# Altium PCB S52最小系统.PcbDoc (part 2 of 9)
Units mm, origin at the board's own origin, x right, y up, seen from the top; angles counter-clockwise.
Board outline 152.4 x 101.6 mm, 2 copper layers (Top Layer, Bottom Layer); 29 components, 53 nets, 176 pads, 2 vias.
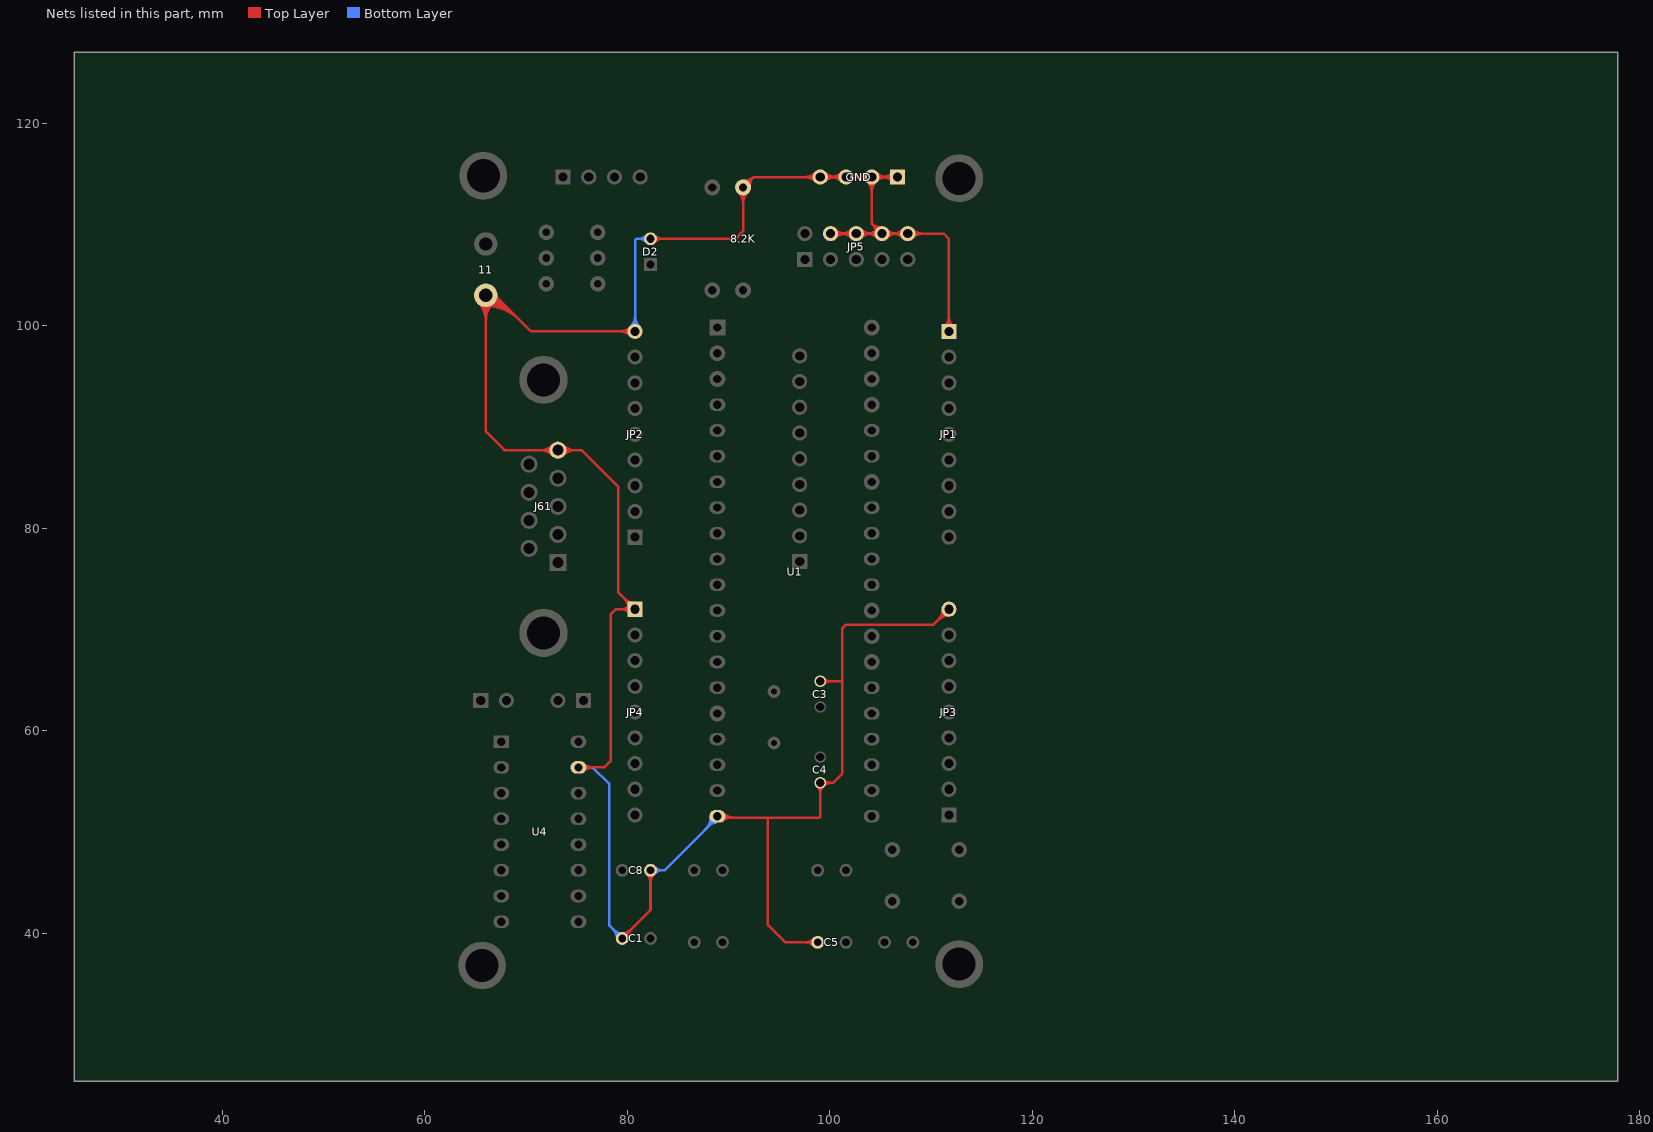
[diagram p2: the nets of this part, all layers, seen from the top]

## Via types
v1: diameter 1.27, hole 0.711, Top Layer to Bottom Layer, 2 vias

## Nets (pads, with @x,y where several pads share a name; then routed paths per layer and width w, separated by ;. In a path a pad name is that pad's centre, name@x,y a point inside that pad or via, vN(x,y) a via of type N, cw(c..) or ccw(c..) an arc to the next point about the centre after c; other vN are vias at no path point) (continued)
GND: (continued)
  Top Layer w0.254: U4.15@75.18,56.387 77.723,56.387 78.359,57.023 78.359,71.501 78.867,72.009 JP4.1@80.772,72.009 79.121,73.66 79.121,84.074 75.486,87.709 67.866,87.709 66.04,89.535 11.2@66.04,102.997 66.929,102.997 70.485,99.441 JP2.9@80.772,99.441 ; C1.2@79.883,39.497 C1.2@79.502,39.497 82.296,42.291 C8.1@82.296,46.228 ; D2.2@82.296,108.585 90.678,108.585 91.441,109.348 91.441,113.666 92.456,114.681 ; U1.20@88.896,51.434 98.934,51.434 99.06,51.56 C4.2@99.06,54.864 100.33,54.864 101.219,55.753 101.219,70.104 101.6,70.485 110.236,70.485 JP3.9@111.76,72.009 ; 93.853,51.434 93.853,40.894 95.631,39.116 C5.2@98.806,39.116 ; C3.2@99.06,64.897 101.092,64.897 101.219,65.024 ; JP5.4@100.076,109.093 111.252,109.093 111.76,108.585 JP1.1@111.76,99.441 ; JP5.4@100.337,108.832 cw(c100.967,108.202) 100.967,109.093 cw(c100.967,109.984) JP5.4@100.337,109.354 ; JP5.4@100.517,108.652 cw(c101.58,107.589) 101.58,109.093 cw(c101.58,110.597) JP5.4@100.517,109.534 ; JP5.6@102.175,108.652 ccw(c101.112,107.589) 101.112,109.093 ccw(c101.112,110.597) JP5.6@102.175,109.534 ; JP5.6@102.355,108.832 ccw(c101.725,108.202) 101.725,109.093 ccw(c101.725,109.984) JP5.6@102.355,109.354 ; GND.2@104.14,114.681 104.14,110.109 ; JP5.8@105.156,109.093 104.14,110.109 ; GND.1@106.68,114.681 92.456,114.681 ; 11.2@65.31,102.267 cw(c63.546,100.503) 66.04,100.503 ; 11.2@65.31,102.267 cw(c63.546,100.503) 66.04,100.503 ; 11.2@65.31,102.267 cw(c63.546,100.503) 66.04,100.503 ; 11.2@65.31,102.267 cw(c63.546,100.503) 66.04,100.503 ; 11.2@65.31,102.267 cw(c63.546,100.503) 66.04,100.503 ; 11.2@65.31,102.267 cw(c63.546,100.503) 66.04,100.503 ; 11.2@65.31,102.267 cw(c63.546,100.503) 66.04,100.503 ; 11.2@65.31,102.267 cw(c63.546,100.503) 66.04,100.503 ; 11.2@65.31,102.267 cw(c63.546,100.503) 66.04,100.503 ; 11.2@65.31,102.267 cw(c63.546,100.503) 66.04,100.503 ; 11.2@65.489,102.446 cw(c64.159,101.116) 66.04,101.116 ; 11.2@65.489,102.446 cw(c64.159,101.116) 66.04,101.116 ; 11.2@65.489,102.446 cw(c64.159,101.116) 66.04,101.116 ; 11.2@65.489,102.446 cw(c64.159,101.116) 66.04,101.116 ; 11.2@65.489,102.446 cw(c64.159,101.116) 66.04,101.116 ; 11.2@65.489,102.446 cw(c64.159,101.116) 66.04,101.116 ; 11.2@65.489,102.446 cw(c64.159,101.116) 66.04,101.116 ; 11.2@65.489,102.446 cw(c64.159,101.116) 66.04,101.116 ; 11.2@65.489,102.446 cw(c64.159,101.116) 66.04,101.116 ; 11.2@65.489,102.446 cw(c64.159,101.116) 66.04,101.116 ; 11.2@65.669,102.626 cw(c64.773,101.73) 66.04,101.73 ; 11.2@65.669,102.626 cw(c64.773,101.73) 66.04,101.73 ; 11.2@65.669,102.626 cw(c64.773,101.73) 66.04,101.73 ; 11.2@65.669,102.626 cw(c64.773,101.73) 66.04,101.73 ; 11.2@65.669,102.626 cw(c64.773,101.73) 66.04,101.73 ; 11.2@65.669,102.626 cw(c64.773,101.73) 66.04,101.73 ; 11.2@65.669,102.626 cw(c64.773,101.73) 66.04,101.73 ; 11.2@65.669,102.626 cw(c64.773,101.73) 66.04,101.73 ; 11.2@65.669,102.626 cw(c64.773,101.73) 66.04,101.73 ; 11.2@65.669,102.626 cw(c64.773,101.73) 66.04,101.73 ; 66.04,100.503 cw(c68.534,100.503) 11.2@66.77,102.267 ; 66.04,100.503 cw(c68.534,100.503) 11.2@66.77,102.267 ; 66.04,100.503 cw(c68.534,100.503) 11.2@66.77,102.267 ; 66.04,100.503 cw(c68.534,100.503) 11.2@66.77,102.267 ; 66.04,100.503 cw(c68.534,100.503) 11.2@66.77,102.267 ; 66.04,100.503 cw(c68.534,100.503) 11.2@66.77,102.267 ; 66.04,100.503 cw(c68.534,100.503) 11.2@66.77,102.267 ; 66.04,100.503 cw(c68.534,100.503) 11.2@66.77,102.267 ; 66.04,100.503 cw(c68.534,100.503) 11.2@66.77,102.267 ; 66.04,100.503 cw(c68.534,100.503) 11.2@66.77,102.267 ; 66.04,101.116 cw(c67.921,101.116) 11.2@66.591,102.446 ; 66.04,101.116 cw(c67.921,101.116) 11.2@66.591,102.446 ; 66.04,101.116 cw(c67.921,101.116) 11.2@66.591,102.446 ; 66.04,101.116 cw(c67.921,101.116) 11.2@66.591,102.446 ; 66.04,101.116 cw(c67.921,101.116) 11.2@66.591,102.446 ; 66.04,101.116 cw(c67.921,101.116) 11.2@66.591,102.446 ; 66.04,101.116 cw(c67.921,101.116) 11.2@66.591,102.446 ; 66.04,101.116 cw(c67.921,101.116) 11.2@66.591,102.446 ; 66.04,101.116 cw(c67.921,101.116) 11.2@66.591,102.446 ; 66.04,101.116 cw(c67.921,101.116) 11.2@66.591,102.446 ; 66.04,101.73 cw(c67.307,101.73) 11.2@66.411,102.626 ; 66.04,101.73 cw(c67.307,101.73) 11.2@66.411,102.626 ; 66.04,101.73 cw(c67.307,101.73) 11.2@66.411,102.626 ; 66.04,101.73 cw(c67.307,101.73) 11.2@66.411,102.626 ; 66.04,101.73 cw(c67.307,101.73) 11.2@66.411,102.626 ; 66.04,101.73 cw(c67.307,101.73) 11.2@66.411,102.626 ; 66.04,101.73 cw(c67.307,101.73) 11.2@66.411,102.626 ; 66.04,101.73 cw(c67.307,101.73) 11.2@66.411,102.626 ; 66.04,101.73 cw(c67.307,101.73) 11.2@66.411,102.626 ; 66.04,101.73 cw(c67.307,101.73) 11.2@66.411,102.626 ; 11.2@66.04,101.964 cw(c66.04,97.324) 69.321,100.605 ; 11.2@66.04,101.964 cw(c66.04,97.324) 69.321,100.605 ; 11.2@66.04,101.964 cw(c66.04,97.324) 69.321,100.605 ; 11.2@66.04,101.964 cw(c66.04,97.324) 69.321,100.605 ; 11.2@66.04,101.964 cw(c66.04,97.324) 69.321,100.605 ; 11.2@66.04,101.964 cw(c66.04,97.324) 69.321,100.605 ; 11.2@66.04,101.964 cw(c66.04,97.324) 69.321,100.605 ; 11.2@66.04,101.964 cw(c66.04,97.324) 69.321,100.605 ; 11.2@66.04,101.964 cw(c66.04,97.324) 69.321,100.605 ; 11.2@66.04,101.964 cw(c66.04,97.324) 69.321,100.605 ; 11.2@66.04,102.218 cw(c66.04,98.191) 68.887,101.039 ; 11.2@66.04,102.218 cw(c66.04,98.191) 68.887,101.039 ; 11.2@66.04,102.218 cw(c66.04,98.191) 68.887,101.039 ; 11.2@66.04,102.218 cw(c66.04,98.191) 68.887,101.039 ; 11.2@66.04,102.218 cw(c66.04,98.191) 68.887,101.039 ; 11.2@66.04,102.218 cw(c66.04,98.191) 68.887,101.039 ; 11.2@66.04,102.218 cw(c66.04,98.191) 68.887,101.039 ; 11.2@66.04,102.218 cw(c66.04,98.191) 68.887,101.039 ; 11.2@66.04,102.218 cw(c66.04,98.191) 68.887,101.039 ; 11.2@66.04,102.218 cw(c66.04,98.191) 68.887,101.039 ; 11.2@66.04,102.472 cw(c66.04,99.058) 68.454,101.472 ; 11.2@66.04,102.472 cw(c66.04,99.058) 68.454,101.472 ; 11.2@66.04,102.472 cw(c66.04,99.058) 68.454,101.472 ; 11.2@66.04,102.472 cw(c66.04,99.058) 68.454,101.472 ; 11.2@66.04,102.472 cw(c66.04,99.058) 68.454,101.472 ; 11.2@66.04,102.472 cw(c66.04,99.058) 68.454,101.472 ; 11.2@66.04,102.472 cw(c66.04,99.058) 68.454,101.472 ; 11.2@66.04,102.472 cw(c66.04,99.058) 68.454,101.472 ; 11.2@66.04,102.472 cw(c66.04,99.058) 68.454,101.472 ; 11.2@66.04,102.472 cw(c66.04,99.058) 68.454,101.472 ; 11.2@66.04,102.726 cw(c66.04,99.926) 68.02,101.906 ; 11.2@66.04,102.726 cw(c66.04,99.926) 68.02,101.906 ; 11.2@66.04,102.726 cw(c66.04,99.926) 68.02,101.906 ; 11.2@66.04,102.726 cw(c66.04,99.926) 68.02,101.906 ; 11.2@66.04,102.726 cw(c66.04,99.926) 68.02,101.906 ; 11.2@66.04,102.726 cw(c66.04,99.926) 68.02,101.906 ; 11.2@66.04,102.726 cw(c66.04,99.926) 68.02,101.906 ; 11.2@66.04,102.726 cw(c66.04,99.926) 68.02,101.906 ; 11.2@66.04,102.726 cw(c66.04,99.926) 68.02,101.906 ; 11.2@66.04,102.726 cw(c66.04,99.926) 68.02,101.906 ; 11.2@66.04,102.98 cw(c66.04,100.793) 67.587,102.339 ; 11.2@66.04,102.98 cw(c66.04,100.793) 67.587,102.339 ; 11.2@66.04,102.98 cw(c66.04,100.793) 67.587,102.339 ; 11.2@66.04,102.98 cw(c66.04,100.793) 67.587,102.339 ; 11.2@66.04,102.98 cw(c66.04,100.793) 67.587,102.339 ; 11.2@66.04,102.98 cw(c66.04,100.793) 67.587,102.339 ; 11.2@66.04,102.98 cw(c66.04,100.793) 67.587,102.339 ; 11.2@66.04,102.98 cw(c66.04,100.793) 67.587,102.339 ; 11.2@66.04,102.98 cw(c66.04,100.793) 67.587,102.339 ; 11.2@66.04,102.98 cw(c66.04,100.793) 67.587,102.339 ; 11.2@67.073,102.997 ccw(c67.421,102.997) 67.175,102.751 ; 11.2@67.073,102.997 ccw(c67.421,102.997) 67.175,102.751 ; 11.2@67.073,102.997 ccw(c67.421,102.997) 67.175,102.751 ; 11.2@67.073,102.997 ccw(c67.421,102.997) 67.175,102.751 ; 11.2@67.073,102.997 ccw(c67.421,102.997) 67.175,102.751 ; 11.2@67.073,102.997 ccw(c67.421,102.997) 67.175,102.751 ; 11.2@67.073,102.997 ccw(c67.421,102.997) 67.175,102.751 ; 11.2@67.073,102.997 ccw(c67.421,102.997) 67.175,102.751 ; 11.2@67.073,102.997 ccw(c67.421,102.997) 67.175,102.751 ; 11.2@67.073,102.997 ccw(c67.421,102.997) 67.175,102.751 ; 71.417,87.709 cw(c71.417,85.976) J61.5@72.642,87.201 ; 71.417,87.709 ccw(c71.417,89.442) J61.5@72.642,88.217 ; 71.417,87.709 cw(c71.417,85.976) J61.5@72.642,87.201 ; 71.417,87.709 ccw(c71.417,89.442) J61.5@72.642,88.217 ; 71.417,87.709 cw(c71.417,85.976) J61.5@72.642,87.201 ; 71.417,87.709 ccw(c71.417,89.442) J61.5@72.642,88.217 ; 71.417,87.709 ccw(c71.417,89.442) J61.5@72.642,88.217 ; 71.417,87.709 cw(c71.417,85.976) J61.5@72.642,87.201 ; 71.417,87.709 ccw(c71.417,89.442) J61.5@72.642,88.217 ; 71.417,87.709 cw(c71.417,85.976) J61.5@72.642,87.201 ; 71.417,87.709 ccw(c71.417,89.442) J61.5@72.642,88.217 ; 71.417,87.709 cw(c71.417,85.976) J61.5@72.642,87.201 ; 71.417,87.709 ccw(c71.417,89.442) J61.5@72.642,88.217 ; 71.417,87.709 cw(c71.417,85.976) J61.5@72.642,87.201 ; 71.417,87.709 ccw(c71.417,89.442) J61.5@72.642,88.217 ; 71.417,87.709 cw(c71.417,85.976) J61.5@72.642,87.201 ; 71.417,87.709 ccw(c71.417,89.442) J61.5@72.642,88.217 ; 71.417,87.709 cw(c71.417,85.976) J61.5@72.642,87.201 ; 71.417,87.709 ccw(c71.417,89.442) J61.5@72.642,88.217 ; 71.417,87.709 cw(c71.417,85.976) J61.5@72.642,87.201 ; 72.03,87.709 cw(c72.03,86.589) J61.5@72.822,87.381 ; 72.03,87.709 ccw(c72.03,88.829) J61.5@72.822,88.037 ; 72.03,87.709 cw(c72.03,86.589) J61.5@72.822,87.381 ; 72.03,87.709 ccw(c72.03,88.829) J61.5@72.822,88.037 ; 72.03,87.709 cw(c72.03,86.589) J61.5@72.822,87.381 ; 72.03,87.709 ccw(c72.03,88.829) J61.5@72.822,88.037 ; 72.03,87.709 ccw(c72.03,88.829) J61.5@72.822,88.037 ; 72.03,87.709 cw(c72.03,86.589) J61.5@72.822,87.381 ; 72.03,87.709 ccw(c72.03,88.829) J61.5@72.822,88.037 ; 72.03,87.709 cw(c72.03,86.589) J61.5@72.822,87.381 ; 72.03,87.709 ccw(c72.03,88.829) J61.5@72.822,88.037 ; 72.03,87.709 cw(c72.03,86.589) J61.5@72.822,87.381 ; 72.03,87.709 ccw(c72.03,88.829) J61.5@72.822,88.037 ; 72.03,87.709 cw(c72.03,86.589) J61.5@72.822,87.381 ; 72.03,87.709 ccw(c72.03,88.829) J61.5@72.822,88.037 ; 72.03,87.709 cw(c72.03,86.589) J61.5@72.822,87.381 ; 72.03,87.709 ccw(c72.03,88.829) J61.5@72.822,88.037 ; 72.03,87.709 cw(c72.03,86.589) J61.5@72.822,87.381 ; 72.03,87.709 ccw(c72.03,88.829) J61.5@72.822,88.037 ; 72.03,87.709 cw(c72.03,86.589) J61.5@72.822,87.381 ; J61.5@73.478,87.381 cw(c74.27,86.589) 74.27,87.709 ; J61.5@73.478,87.381 cw(c74.27,86.589) 74.27,87.709 ; J61.5@73.478,87.381 cw(c74.27,86.589) 74.27,87.709 ; J61.5@73.478,87.381 cw(c74.27,86.589) 74.27,87.709 ; J61.5@73.478,87.381 cw(c74.27,86.589) 74.27,87.709 ; J61.5@73.478,87.381 cw(c74.27,86.589) 74.27,87.709 ; J61.5@73.478,87.381 cw(c74.27,86.589) 74.27,87.709 ; J61.5@73.478,87.381 cw(c74.27,86.589) 74.27,87.709 ; J61.5@73.478,87.381 cw(c74.27,86.589) 74.27,87.709 ; J61.5@73.478,87.381 cw(c74.27,86.589) 74.27,87.709 ; J61.5@73.478,88.037 ccw(c74.27,88.829) 74.27,87.709 ; J61.5@73.478,88.037 ccw(c74.27,88.829) 74.27,87.709 ; J61.5@73.478,88.037 ccw(c74.27,88.829) 74.27,87.709 ; J61.5@73.478,88.037 ccw(c74.27,88.829) 74.27,87.709 ; J61.5@73.478,88.037 ccw(c74.27,88.829) 74.27,87.709 ; J61.5@73.478,88.037 ccw(c74.27,88.829) 74.27,87.709 ; J61.5@73.478,88.037 ccw(c74.27,88.829) 74.27,87.709 ; J61.5@73.478,88.037 ccw(c74.27,88.829) 74.27,87.709 ; J61.5@73.478,88.037 ccw(c74.27,88.829) 74.27,87.709 ; J61.5@73.478,88.037 ccw(c74.27,88.829) 74.27,87.709 ; J61.5@73.658,87.201 cw(c74.883,85.976) 74.883,87.709 ; J61.5@73.658,87.201 cw(c74.883,85.976) 74.883,87.709 ; J61.5@73.658,87.201 cw(c74.883,85.976) 74.883,87.709 ; J61.5@73.658,87.201 cw(c74.883,85.976) 74.883,87.709 ; J61.5@73.658,87.201 cw(c74.883,85.976) 74.883,87.709 ; J61.5@73.658,87.201 cw(c74.883,85.976) 74.883,87.709 ; J61.5@73.658,87.201 cw(c74.883,85.976) 74.883,87.709 ; J61.5@73.658,87.201 cw(c74.883,85.976) 74.883,87.709 ; J61.5@73.658,87.201 cw(c74.883,85.976) 74.883,87.709 ; J61.5@73.658,87.201 cw(c74.883,85.976) 74.883,87.709 ; J61.5@73.658,88.217 ccw(c74.883,89.442) 74.883,87.709 ; J61.5@73.658,88.217 ccw(c74.883,89.442) 74.883,87.709 ; J61.5@73.658,88.217 ccw(c74.883,89.442) 74.883,87.709 ; J61.5@73.658,88.217 ccw(c74.883,89.442) 74.883,87.709 ; J61.5@73.658,88.217 ccw(c74.883,89.442) 74.883,87.709 ; J61.5@73.658,88.217 ccw(c74.883,89.442) 74.883,87.709 ; J61.5@73.658,88.217 ccw(c74.883,89.442) 74.883,87.709 ; J61.5@73.658,88.217 ccw(c74.883,89.442) 74.883,87.709 ; J61.5@73.658,88.217 ccw(c74.883,89.442) 74.883,87.709 ; J61.5@73.658,88.217 ccw(c74.883,89.442) 74.883,87.709 ; U4.15@75.695,56.035 cw(c76.545,55.185) 76.545,56.387 ; U4.15@75.695,56.035 cw(c76.545,55.185) 76.545,56.387 ; U4.15@75.695,56.035 cw(c76.545,55.185) 76.545,56.387 ; U4.15@75.695,56.035 cw(c76.545,55.185) 76.545,56.387 ; U4.15@75.695,56.035 cw(c76.545,55.185) 76.545,56.387 ; U4.15@75.695,56.035 cw(c76.545,55.185) 76.545,56.387 ; U4.15@75.695,56.035 cw(c76.545,55.185) 76.545,56.387 ; U4.15@75.695,56.035 cw(c76.545,55.185) 76.545,56.387 ; U4.15@75.695,56.035 cw(c76.545,55.185) 76.545,56.387 ; U4.15@75.695,56.035 cw(c76.545,55.185) 76.545,56.387 ; U4.15@75.695,56.739 ccw(c76.545,57.589) 76.545,56.387 ; U4.15@75.695,56.739 ccw(c76.545,57.589) 76.545,56.387 ; U4.15@75.695,56.739 ccw(c76.545,57.589) 76.545,56.387 ; U4.15@75.695,56.739 ccw(c76.545,57.589) 76.545,56.387 ; U4.15@75.695,56.739 ccw(c76.545,57.589) 76.545,56.387 ; U4.15@75.695,56.739 ccw(c76.545,57.589) 76.545,56.387 ; U4.15@75.695,56.739 ccw(c76.545,57.589) 76.545,56.387 ; U4.15@75.695,56.739 ccw(c76.545,57.589) 76.545,56.387 ; U4.15@75.695,56.739 ccw(c76.545,57.589) 76.545,56.387 ; U4.15@75.695,56.739 ccw(c76.545,57.589) 76.545,56.387 ; 79.268,72.009 cw(c79.268,70.505) JP4.1@80.331,71.568 ; 79.268,72.009 ccw(c79.268,73.513) JP4.1@80.331,72.45 ; 79.268,72.009 cw(c79.268,70.505) JP4.1@80.331,71.568 ; 79.268,72.009 ccw(c79.268,73.513) JP4.1@80.331,72.45 ; 79.268,72.009 cw(c79.268,70.505) JP4.1@80.331,71.568 ; 79.268,72.009 ccw(c79.268,73.513) JP4.1@80.331,72.45 ; 79.268,72.009 ccw(c79.268,73.513) JP4.1@80.331,72.45 ; 79.268,72.009 cw(c79.268,70.505) JP4.1@80.331,71.568 ; 79.268,72.009 ccw(c79.268,73.513) JP4.1@80.331,72.45 ; 79.268,72.009 cw(c79.268,70.505) JP4.1@80.331,71.568 ; 79.268,72.009 ccw(c79.268,73.513) JP4.1@80.331,72.45 ; 79.268,72.009 cw(c79.268,70.505) JP4.1@80.331,71.568 ; 79.268,72.009 ccw(c79.268,73.513) JP4.1@80.331,72.45 ; 79.268,72.009 cw(c79.268,70.505) JP4.1@80.331,71.568 ; 79.268,72.009 ccw(c79.268,73.513) JP4.1@80.331,72.45 ; 79.268,72.009 cw(c79.268,70.505) JP4.1@80.331,71.568 ; 79.268,72.009 ccw(c79.268,73.513) JP4.1@80.331,72.45 ; 79.268,72.009 cw(c79.268,70.505) JP4.1@80.331,71.568 ; 79.268,72.009 ccw(c79.268,73.513) JP4.1@80.331,72.45 ; 79.268,72.009 cw(c79.268,70.505) JP4.1@80.331,71.568 ; 79.268,99.441 cw(c79.268,97.937) JP2.9@80.331,99 ; 79.268,99.441 ccw(c79.268,100.945) JP2.9@80.331,99.882 ; 79.268,99.441 cw(c79.268,97.937) JP2.9@80.331,99 ; 79.268,99.441 ccw(c79.268,100.945) JP2.9@80.331,99.882 ; 79.268,99.441 cw(c79.268,97.937) JP2.9@80.331,99 ; 79.268,99.441 ccw(c79.268,100.945) JP2.9@80.331,99.882 ; 79.268,99.441 ccw(c79.268,100.945) JP2.9@80.331,99.882 ; 79.268,99.441 cw(c79.268,97.937) JP2.9@80.331,99 ; 79.268,99.441 ccw(c79.268,100.945) JP2.9@80.331,99.882 ; 79.268,99.441 cw(c79.268,97.937) JP2.9@80.331,99 ; 79.268,99.441 ccw(c79.268,100.945) JP2.9@80.331,99.882 ; 79.268,99.441 cw(c79.268,97.937) JP2.9@80.331,99 ; 79.268,99.441 ccw(c79.268,100.945) JP2.9@80.331,99.882 ; 79.268,99.441 cw(c79.268,97.937) JP2.9@80.331,99 ; 79.268,99.441 ccw(c79.268,100.945) JP2.9@80.331,99.882 ; 79.268,99.441 cw(c79.268,97.937) JP2.9@80.331,99 ; 79.268,99.441 ccw(c79.268,100.945) JP2.9@80.331,99.882 ; 79.268,99.441 cw(c79.268,97.937) JP2.9@80.331,99 ; 79.268,99.441 ccw(c79.268,100.945) JP2.9@80.331,99.882 ; 79.268,99.441 cw(c79.268,97.937) JP2.9@80.331,99 ; C1.2@79.502,40.005 ccw(c79.502,41.231) 80.369,40.364 ; C1.2@79.502,40.005 ccw(c79.502,41.231) 80.369,40.364 ; C1.2@79.502,40.005 ccw(c79.502,41.231) 80.369,40.364 ; C1.2@79.502,40.005 ccw(c79.502,41.231) 80.369,40.364 ; C1.2@79.502,40.005 ccw(c79.502,41.231) 80.369,40.364 ; C1.2@79.502,40.005 ccw(c79.502,41.231) 80.369,40.364 ; C1.2@79.502,40.005 ccw(c79.502,41.231) 80.369,40.364 ; C1.2@79.502,40.005 ccw(c79.502,41.231) 80.369,40.364 ; C1.2@79.502,40.005 ccw(c79.502,41.231) 80.369,40.364 ; C1.2@79.502,40.005 ccw(c79.502,41.231) 80.369,40.364 ; 79.708,73.073 cw(c78.645,72.009) JP4.1@80.149,72.009 ; 79.708,73.073 ccw(c80.772,74.136) JP4.1@80.772,72.632 ; 79.708,73.073 cw(c78.645,72.009) JP4.1@80.149,72.009 ; 79.708,73.073 ccw(c80.772,74.136) JP4.1@80.772,72.632 ; 79.708,73.073 cw(c78.645,72.009) JP4.1@80.149,72.009 ; 79.708,73.073 ccw(c80.772,74.136) JP4.1@80.772,72.632 ; 79.708,73.073 ccw(c80.772,74.136) JP4.1@80.772,72.632 ; 79.708,73.073 cw(c78.645,72.009) JP4.1@80.149,72.009 ; 79.708,73.073 ccw(c80.772,74.136) JP4.1@80.772,72.632 ; 79.708,73.073 cw(c78.645,72.009) JP4.1@80.149,72.009 ; 79.708,73.073 ccw(c80.772,74.136) JP4.1@80.772,72.632 ; 79.708,73.073 cw(c78.645,72.009) JP4.1@80.149,72.009 ; 79.708,73.073 ccw(c80.772,74.136) JP4.1@80.772,72.632 ; 79.708,73.073 cw(c78.645,72.009) JP4.1@80.149,72.009 ; 79.708,73.073 ccw(c80.772,74.136) JP4.1@80.772,72.632 ; 79.708,73.073 cw(c78.645,72.009) JP4.1@80.149,72.009 ; 79.708,73.073 ccw(c80.772,74.136) JP4.1@80.772,72.632 ; 79.708,73.073 cw(c78.645,72.009) JP4.1@80.149,72.009 ; 79.708,73.073 ccw(c80.772,74.136) JP4.1@80.772,72.632 ; 79.708,73.073 cw(c78.645,72.009) JP4.1@80.149,72.009 ; 79.881,72.009 cw(c79.881,71.118) JP4.1@80.511,71.748 ; 79.881,72.009 ccw(c79.881,72.9) JP4.1@80.511,72.27 ; 79.881,72.009 cw(c79.881,71.118) JP4.1@80.511,71.748 ; 79.881,72.009 ccw(c79.881,72.9) JP4.1@80.511,72.27 ; 79.881,72.009 cw(c79.881,71.118) JP4.1@80.511,71.748 ; 79.881,72.009 ccw(c79.881,72.9) JP4.1@80.511,72.27 ; 79.881,72.009 ccw(c79.881,72.9) JP4.1@80.511,72.27 ; 79.881,72.009 cw(c79.881,71.118) JP4.1@80.511,71.748 ; 79.881,72.009 ccw(c79.881,72.9) JP4.1@80.511,72.27 ; 79.881,72.009 cw(c79.881,71.118) JP4.1@80.511,71.748 ; 79.881,72.009 ccw(c79.881,72.9) JP4.1@80.511,72.27 ; 79.881,72.009 cw(c79.881,71.118) JP4.1@80.511,71.748 ; 79.881,72.009 ccw(c79.881,72.9) JP4.1@80.511,72.27 ; 79.881,72.009 cw(c79.881,71.118) JP4.1@80.511,71.748 ; 79.881,72.009 ccw(c79.881,72.9) JP4.1@80.511,72.27 ; 79.881,72.009 cw(c79.881,71.118) JP4.1@80.511,71.748 ; 79.881,72.009 ccw(c79.881,72.9) JP4.1@80.511,72.27 ; 79.881,72.009 cw(c79.881,71.118) JP4.1@80.511,71.748 ; 79.881,72.009 ccw(c79.881,72.9) JP4.1@80.511,72.27 ; 79.881,72.009 cw(c79.881,71.118) JP4.1@80.511,71.748 ; 79.881,99.441 cw(c79.881,98.55) JP2.9@80.511,99.18 ; 79.881,99.441 ccw(c79.881,100.332) JP2.9@80.511,99.702 ; 79.881,99.441 cw(c79.881,98.55) JP2.9@80.511,99.18 ; 79.881,99.441 ccw(c79.881,100.332) JP2.9@80.511,99.702 ; 79.881,99.441 cw(c79.881,98.55) JP2.9@80.511,99.18 ; 79.881,99.441 ccw(c79.881,100.332) JP2.9@80.511,99.702 ; 79.881,99.441 ccw(c79.881,100.332) JP2.9@80.511,99.702 ; 79.881,99.441 cw(c79.881,98.55) JP2.9@80.511,99.18 ; 79.881,99.441 ccw(c79.881,100.332) JP2.9@80.511,99.702 ; 79.881,99.441 cw(c79.881,98.55) JP2.9@80.511,99.18 ; 79.881,99.441 ccw(c79.881,100.332) JP2.9@80.511,99.702 ; 79.881,99.441 cw(c79.881,98.55) JP2.9@80.511,99.18 ; 79.881,99.441 ccw(c79.881,100.332) JP2.9@80.511,99.702 ; 79.881,99.441 cw(c79.881,98.55) JP2.9@80.511,99.18 ; 79.881,99.441 ccw(c79.881,100.332) JP2.9@80.511,99.702 ; 79.881,99.441 cw(c79.881,98.55) JP2.9@80.511,99.18 ; 79.881,99.441 ccw(c79.881,100.332) JP2.9@80.511,99.702 ; 79.881,99.441 cw(c79.881,98.55) JP2.9@80.511,99.18 ; 79.881,99.441 ccw(c79.881,100.332) JP2.9@80.511,99.702 ; 79.881,99.441 cw(c79.881,98.55) JP2.9@80.511,99.18 ; C1.2@80.01,39.497 cw(c81.236,39.497) 80.369,40.364 ; C1.2@80.01,39.497 cw(c81.236,39.497) 80.369,40.364 ; C1.2@80.01,39.497 cw(c81.236,39.497) 80.369,40.364 ; C1.2@80.01,39.497 cw(c81.236,39.497) 80.369,40.364 ; C1.2@80.01,39.497 cw(c81.236,39.497) 80.369,40.364 ; C1.2@80.01,39.497 cw(c81.236,39.497) 80.369,40.364 ; C1.2@80.01,39.497 cw(c81.236,39.497) 80.369,40.364 ; C1.2@80.01,39.497 cw(c81.236,39.497) 80.369,40.364 ; C1.2@80.01,39.497 cw(c81.236,39.497) 80.369,40.364 ; C1.2@80.01,39.497 cw(c81.236,39.497) 80.369,40.364 ; JP4.1@80.142,72.639 cw(c79.512,72.009) JP4.1@80.403,72.009 ; JP4.1@80.142,72.639 ccw(c80.772,73.269) JP4.1@80.772,72.378 ; JP4.1@80.142,72.639 cw(c79.512,72.009) JP4.1@80.403,72.009 ; JP4.1@80.142,72.639 ccw(c80.772,73.269) JP4.1@80.772,72.378 ; JP4.1@80.142,72.639 cw(c79.512,72.009) JP4.1@80.403,72.009 ; JP4.1@80.142,72.639 ccw(c80.772,73.269) JP4.1@80.772,72.378 ; JP4.1@80.142,72.639 ccw(c80.772,73.269) JP4.1@80.772,72.378 ; JP4.1@80.142,72.639 cw(c79.512,72.009) JP4.1@80.403,72.009 ; JP4.1@80.142,72.639 ccw(c80.772,73.269) JP4.1@80.772,72.378 ; JP4.1@80.142,72.639 cw(c79.512,72.009) JP4.1@80.403,72.009 ; JP4.1@80.142,72.639 ccw(c80.772,73.269) JP4.1@80.772,72.378 ; JP4.1@80.142,72.639 cw(c79.512,72.009) JP4.1@80.403,72.009 ; JP4.1@80.142,72.639 ccw(c80.772,73.269) JP4.1@80.772,72.378 ; JP4.1@80.142,72.639 cw(c79.512,72.009) JP4.1@80.403,72.009 ; JP4.1@80.142,72.639 ccw(c80.772,73.269) JP4.1@80.772,72.378 ; JP4.1@80.142,72.639 cw(c79.512,72.009) JP4.1@80.403,72.009 ; JP4.1@80.142,72.639 ccw(c80.772,73.269) JP4.1@80.772,72.378 ; JP4.1@80.142,72.639 cw(c79.512,72.009) JP4.1@80.403,72.009 ; JP4.1@80.142,72.639 ccw(c80.772,73.269) JP4.1@80.772,72.378 ; JP4.1@80.142,72.639 cw(c79.512,72.009) JP4.1@80.403,72.009 ; C8.1@81.937,45.869 cw(c81.07,45.002) 82.296,45.002 ; C8.1@81.937,45.869 cw(c81.07,45.002) 82.296,45.002 ; C8.1@81.937,45.869 cw(c81.07,45.002) 82.296,45.002 ; C8.1@81.937,45.869 cw(c81.07,45.002) 82.296,45.002 ; C8.1@81.937,45.869 cw(c81.07,45.002) 82.296,45.002 ; C8.1@81.937,45.869 cw(c81.07,45.002) 82.296,45.002 ; C8.1@81.937,45.869 cw(c81.07,45.002) 82.296,45.002 ; C8.1@81.937,45.869 cw(c81.07,45.002) 82.296,45.002 ; C8.1@81.937,45.869 cw(c81.07,45.002) 82.296,45.002 ; C8.1@81.937,45.869 cw(c81.07,45.002) 82.296,45.002 ; 82.296,45.002 cw(c83.522,45.002) C8.1@82.655,45.869 ; 82.296,45.002 cw(c83.522,45.002) C8.1@82.655,45.869 ; 82.296,45.002 cw(c83.522,45.002) C8.1@82.655,45.869 ; 82.296,45.002 cw(c83.522,45.002) C8.1@82.655,45.869 ; 82.296,45.002 cw(c83.522,45.002) C8.1@82.655,45.869 ; 82.296,45.002 cw(c83.522,45.002) C8.1@82.655,45.869 ; 82.296,45.002 cw(c83.522,45.002) C8.1@82.655,45.869 ; 82.296,45.002 cw(c83.522,45.002) C8.1@82.655,45.869 ; 82.296,45.002 cw(c83.522,45.002) C8.1@82.655,45.869 ; 82.296,45.002 cw(c83.522,45.002) C8.1@82.655,45.869 ; D2.2@82.655,108.226 cw(c83.522,107.359) 83.522,108.585 ; D2.2@82.655,108.226 cw(c83.522,107.359) 83.522,108.585 ; D2.2@82.655,108.226 cw(c83.522,107.359) 83.522,108.585 ; D2.2@82.655,108.226 cw(c83.522,107.359) 83.522,108.585 ; D2.2@82.655,108.226 cw(c83.522,107.359) 83.522,108.585 ; D2.2@82.655,108.226 cw(c83.522,107.359) 83.522,108.585 ; D2.2@82.655,108.226 cw(c83.522,107.359) 83.522,108.585 ; D2.2@82.655,108.226 cw(c83.522,107.359) 83.522,108.585 ; D2.2@82.655,108.226 cw(c83.522,107.359) 83.522,108.585 ; D2.2@82.655,108.226 cw(c83.522,107.359) 83.522,108.585 ; D2.2@82.655,108.944 ccw(c83.522,109.811) 83.522,108.585 ; D2.2@82.655,108.944 ccw(c83.522,109.811) 83.522,108.585 ; D2.2@82.655,108.944 ccw(c83.522,109.811) 83.522,108.585 ; D2.2@82.655,108.944 ccw(c83.522,109.811) 83.522,108.585 ; D2.2@82.655,108.944 ccw(c83.522,109.811) 83.522,108.585 ; D2.2@82.655,108.944 ccw(c83.522,109.811) 83.522,108.585 ; D2.2@82.655,108.944 ccw(c83.522,109.811) 83.522,108.585 ; D2.2@82.655,108.944 ccw(c83.522,109.811) 83.522,108.585 ; D2.2@82.655,108.944 ccw(c83.522,109.811) 83.522,108.585 ; D2.2@82.655,108.944 ccw(c83.522,109.811) 83.522,108.585 ; U1.20@89.231,51.734 ccw(c89.954,52.457) 89.954,51.434 ; U1.20@89.231,51.734 ccw(c89.954,52.457) 89.954,51.434 ; U1.20@89.231,51.734 ccw(c89.954,52.457) 89.954,51.434 ; U1.20@89.231,51.734 ccw(c89.954,52.457) 89.954,51.434 ; U1.20@89.411,51.082 cw(c90.261,50.232) 90.261,51.434 ; U1.20@89.411,51.082 cw(c90.261,50.232) 90.261,51.434 ; U1.20@89.411,51.082 cw(c90.261,50.232) 90.261,51.434 ; U1.20@89.411,51.082 cw(c90.261,50.232) 90.261,51.434 ; U1.20@89.411,51.082 cw(c90.261,50.232) 90.261,51.434 ; U1.20@89.411,51.082 cw(c90.261,50.232) 90.261,51.434 ; U1.20@89.411,51.209 cw(c89.954,50.665) 89.954,51.434 ; U1.20@89.411,51.209 cw(c89.954,50.665) 89.954,51.434 ; U1.20@89.411,51.209 cw(c89.954,50.665) 89.954,51.434 ; U1.20@89.411,51.209 cw(c89.954,50.665) 89.954,51.434 ; U1.20@89.411,51.786 ccw(c90.261,52.636) 90.261,51.434 ; U1.20@89.411,51.786 ccw(c90.261,52.636) 90.261,51.434 ; U1.20@89.411,51.786 ccw(c90.261,52.636) 90.261,51.434 ; U1.20@89.411,51.786 ccw(c90.261,52.636) 90.261,51.434 ; U1.20@89.411,51.786 ccw(c90.261,52.636) 90.261,51.434 ; U1.20@89.411,51.786 ccw(c90.261,52.636) 90.261,51.434 ; U1.20@89.411,51.913 ccw(c90.567,53.07) 90.567,51.434 ; U1.20@89.411,51.913 ccw(c90.567,53.07) 90.567,51.434 ; U1.20@89.411,51.913 ccw(c90.567,53.07) 90.567,51.434 ; U1.20@89.411,51.913 ccw(c90.567,53.07) 90.567,51.434 ; 8.2K.2@90.974,113.194 cw(c89.847,112.067) 91.441,112.067 ; 8.2K.2@90.974,113.194 cw(c89.847,112.067) 91.441,112.067 ; 8.2K.2@90.974,113.194 cw(c89.847,112.067) 91.441,112.067 ; 8.2K.2@90.974,113.194 cw(c89.847,112.067) 91.441,112.067 ; 8.2K.2@90.974,113.194 cw(c89.847,112.067) 91.441,112.067 ; 8.2K.2@90.974,113.194 cw(c89.847,112.067) 91.441,112.067 ; 8.2K.2@90.974,113.194 cw(c89.847,112.067) 91.441,112.067 ; 8.2K.2@90.974,113.194 cw(c89.847,112.067) 91.441,112.067 ; 8.2K.2@90.974,113.194 cw(c89.847,112.067) 91.441,112.067 ; 8.2K.2@90.974,113.194 cw(c89.847,112.067) 91.441,112.067 ; 8.2K.2@91.154,113.374 cw(c90.46,112.68) 91.441,112.68 ; 8.2K.2@91.154,113.374 cw(c90.46,112.68) 91.441,112.68 ; 8.2K.2@91.154,113.374 cw(c90.46,112.68) 91.441,112.68 ; 8.2K.2@91.154,113.374 cw(c90.46,112.68) 91.441,112.68 ; 8.2K.2@91.154,113.374 cw(c90.46,112.68) 91.441,112.68 ; 8.2K.2@91.154,113.374 cw(c90.46,112.68) 91.441,112.68 ; 8.2K.2@91.154,113.374 cw(c90.46,112.68) 91.441,112.68 ; 8.2K.2@91.154,113.374 cw(c90.46,112.68) 91.441,112.68 ; 8.2K.2@91.154,113.374 cw(c90.46,112.68) 91.441,112.68 ; 8.2K.2@91.154,113.374 cw(c90.46,112.68) 91.441,112.68 ; 91.441,112.067 cw(c93.035,112.067) 8.2K.2@91.908,113.194 ; 91.441,112.067 cw(c93.035,112.067) 8.2K.2@91.908,113.194 ; 91.441,112.067 cw(c93.035,112.067) 8.2K.2@91.908,113.194 ; 91.441,112.067 cw(c93.035,112.067) 8.2K.2@91.908,113.194 ; 91.441,112.067 cw(c93.035,112.067) 8.2K.2@91.908,113.194 ; 91.441,112.067 cw(c93.035,112.067) 8.2K.2@91.908,113.194 ; 91.441,112.067 cw(c93.035,112.067) 8.2K.2@91.908,113.194 ; 91.441,112.067 cw(c93.035,112.067) 8.2K.2@91.908,113.194 ; 91.441,112.067 cw(c93.035,112.067) 8.2K.2@91.908,113.194 ; 91.441,112.067 cw(c93.035,112.067) 8.2K.2@91.908,113.194 ; 91.441,112.68 cw(c92.422,112.68) 8.2K.2@91.728,113.374 ; 91.441,112.68 cw(c92.422,112.68) 8.2K.2@91.728,113.374 ; 91.441,112.68 cw(c92.422,112.68) 8.2K.2@91.728,113.374 ; 91.441,112.68 cw(c92.422,112.68) 8.2K.2@91.728,113.374 ; 91.441,112.68 cw(c92.422,112.68) 8.2K.2@91.728,113.374 ; 91.441,112.68 cw(c92.422,112.68) 8.2K.2@91.728,113.374 ; 91.441,112.68 cw(c92.422,112.68) 8.2K.2@91.728,113.374 ; 91.441,112.68 cw(c92.422,112.68) 8.2K.2@91.728,113.374 ; 91.441,112.68 cw(c92.422,112.68) 8.2K.2@91.728,113.374 ; 91.441,112.68 cw(c92.422,112.68) 8.2K.2@91.728,113.374 ; 8.2K.2@91.47,114.067 ccw(c91.524,114.826) 92.063,114.288 ; 8.2K.2@91.47,114.067 ccw(c91.524,114.826) 92.063,114.288 ; 8.2K.2@91.47,114.067 ccw(c91.524,114.826) 92.063,114.288 ; 8.2K.2@91.47,114.067 ccw(c91.524,114.826) 92.063,114.288 ; 8.2K.2@91.47,114.067 ccw(c91.524,114.826) 92.063,114.288 ; 8.2K.2@91.47,114.067 ccw(c91.524,114.826) 92.063,114.288 ; 8.2K.2@91.47,114.067 ccw(c91.524,114.826) 92.063,114.288 ; 8.2K.2@91.47,114.067 ccw(c91.524,114.826) 92.063,114.288 ; 8.2K.2@91.47,114.067 ccw(c91.524,114.826) 92.063,114.288 ; 8.2K.2@91.47,114.067 ccw(c91.524,114.826) 92.063,114.288 ; 8.2K.2@91.488,114.32 ccw(c91.577,115.56) 92.456,114.681 ; 8.2K.2@91.488,114.32 ccw(c91.577,115.56) 92.456,114.681 ; 8.2K.2@91.488,114.32 ccw(c91.577,115.56) 92.456,114.681 ; 8.2K.2@91.488,114.32 ccw(c91.577,115.56) 92.456,114.681 ; 8.2K.2@91.488,114.32 ccw(c91.577,115.56) 92.456,114.681 ; 8.2K.2@91.488,114.32 ccw(c91.577,115.56) 92.456,114.681 ; 8.2K.2@91.488,114.32 ccw(c91.577,115.56) 92.456,114.681 ; 8.2K.2@91.488,114.32 ccw(c91.577,115.56) 92.456,114.681 ; 8.2K.2@91.488,114.32 ccw(c91.577,115.56) 92.456,114.681 ; 8.2K.2@91.488,114.32 ccw(c91.577,115.56) 92.456,114.681 ; 8.2K.2@91.846,113.693 cw(c92.605,113.753) 92.067,114.292 ; 8.2K.2@91.846,113.693 cw(c92.605,113.753) 92.067,114.292 ; 8.2K.2@91.846,113.693 cw(c92.605,113.753) 92.067,114.292 ; 8.2K.2@91.846,113.693 cw(c92.605,113.753) 92.067,114.292 ; 8.2K.2@91.846,113.693 cw(c92.605,113.753) 92.067,114.292 ; 8.2K.2@91.846,113.693 cw(c92.605,113.753) 92.067,114.292 ; 8.2K.2@91.846,113.693 cw(c92.605,113.753) 92.067,114.292 ; 8.2K.2@91.846,113.693 cw(c92.605,113.753) 92.067,114.292 ; 8.2K.2@91.846,113.693 cw(c92.605,113.753) 92.067,114.292 ; 8.2K.2@91.846,113.693 cw(c92.605,113.753) 92.067,114.292 ; 8.2K.2@92.099,113.713 cw(c93.326,113.811) 92.456,114.681 ; 8.2K.2@92.099,113.713 cw(c93.326,113.811) 92.456,114.681 ; 8.2K.2@92.099,113.713 cw(c93.326,113.811) 92.456,114.681 ; 8.2K.2@92.099,113.713 cw(c93.326,113.811) 92.456,114.681 ; 8.2K.2@92.099,113.713 cw(c93.326,113.811) 92.456,114.681 ; 8.2K.2@92.099,113.713 cw(c93.326,113.811) 92.456,114.681 ; 8.2K.2@92.099,113.713 cw(c93.326,113.811) 92.456,114.681 ; 8.2K.2@92.099,113.713 cw(c93.326,113.811) 92.456,114.681 ; 8.2K.2@92.099,113.713 cw(c93.326,113.811) 92.456,114.681 ; 8.2K.2@92.099,113.713 cw(c93.326,113.811) 92.456,114.681 ; 97.556,114.681 cw(c97.556,113.177) GND.4@98.619,114.24 ; 97.556,114.681 ccw(c97.556,116.185) GND.4@98.619,115.122 ; 97.556,114.681 cw(c97.556,113.177) GND.4@98.619,114.24 ; 97.556,114.681 ccw(c97.556,116.185) GND.4@98.619,115.122 ; 97.556,114.681 cw(c97.556,113.177) GND.4@98.619,114.24 ; 97.556,114.681 ccw(c97.556,116.185) GND.4@98.619,115.122 ; 97.556,114.681 ccw(c97.556,116.185) GND.4@98.619,115.122 ; 97.556,114.681 cw(c97.556,113.177) GND.4@98.619,114.24 ; 97.556,114.681 ccw(c97.556,116.185) GND.4@98.619,115.122 ; 97.556,114.681 cw(c97.556,113.177) GND.4@98.619,114.24 ; 97.556,114.681 ccw(c97.556,116.185) GND.4@98.619,115.122 ; 97.556,114.681 cw(c97.556,113.177) GND.4@98.619,114.24 ; 97.556,114.681 ccw(c97.556,116.185) GND.4@98.619,115.122 ; 97.556,114.681 cw(c97.556,113.177) GND.4@98.619,114.24 ; 97.556,114.681 ccw(c97.556,116.185) GND.4@98.619,115.122 ; 97.556,114.681 cw(c97.556,113.177) GND.4@98.619,114.24 ; 97.556,114.681 ccw(c97.556,116.185) GND.4@98.619,115.122 ; 97.556,114.681 cw(c97.556,113.177) GND.4@98.619,114.24 ; 97.556,114.681 ccw(c97.556,116.185) GND.4@98.619,115.122 ; 97.556,114.681 cw(c97.556,113.177) GND.4@98.619,114.24 ; 97.58,39.116 cw(c97.58,37.89) C5.2@98.447,38.757 ; 97.58,39.116 ccw(c97.58,40.342) C5.2@98.447,39.475 ; 97.58,39.116 cw(c97.58,37.89) C5.2@98.447,38.757 ; 97.58,39.116 ccw(c97.58,40.342) C5.2@98.447,39.475 ; 97.58,39.116 ccw(c97.58,40.342) C5.2@98.447,39.475 ; 97.58,39.116 cw(c97.58,37.89) C5.2@98.447,38.757 ; 97.58,39.116 ccw(c97.58,40.342) C5.2@98.447,39.475 ; 97.58,39.116 cw(c97.58,37.89) C5.2@98.447,38.757 ; 97.58,39.116 ccw(c97.58,40.342) C5.2@98.447,39.475 ; 97.58,39.116 cw(c97.58,37.89) C5.2@98.447,38.757 ; 97.58,39.116 ccw(c97.58,40.342) C5.2@98.447,39.475 ; 97.58,39.116 cw(c97.58,37.89) C5.2@98.447,38.757 ; 97.58,39.116 ccw(c97.58,40.342) C5.2@98.447,39.475 ; 97.58,39.116 cw(c97.58,37.89) C5.2@98.447,38.757 ; 97.58,39.116 ccw(c97.58,40.342) C5.2@98.447,39.475 ; 97.58,39.116 cw(c97.58,37.89) C5.2@98.447,38.757 ; 97.58,39.116 ccw(c97.58,40.342) C5.2@98.447,39.475 ; 97.58,39.116 cw(c97.58,37.89) C5.2@98.447,38.757 ; 98.169,114.681 cw(c98.169,113.79) GND.4@98.799,114.42 ; 98.169,114.681 ccw(c98.169,115.572) GND.4@98.799,114.942 ; 98.169,114.681 cw(c98.169,113.79) GND.4@98.799,114.42 ; 98.169,114.681 ccw(c98.169,115.572) GND.4@98.799,114.942 ; 98.169,114.681 cw(c98.169,113.79) GND.4@98.799,114.42 ; 98.169,114.681 ccw(c98.169,115.572) GND.4@98.799,114.942 ; 98.169,114.681 ccw(c98.169,115.572) GND.4@98.799,114.942 ; 98.169,114.681 cw(c98.169,113.79) GND.4@98.799,114.42 ; 98.169,114.681 ccw(c98.169,115.572) GND.4@98.799,114.942 ; 98.169,114.681 cw(c98.169,113.79) GND.4@98.799,114.42 ; 98.169,114.681 ccw(c98.169,115.572) GND.4@98.799,114.942 ; 98.169,114.681 cw(c98.169,113.79) GND.4@98.799,114.42 ; 98.169,114.681 ccw(c98.169,115.572) GND.4@98.799,114.942 ; 98.169,114.681 cw(c98.169,113.79) GND.4@98.799,114.42 ; 98.169,114.681 ccw(c98.169,115.572) GND.4@98.799,114.942 ; 98.169,114.681 cw(c98.169,113.79) GND.4@98.799,114.42 ; 98.169,114.681 ccw(c98.169,115.572) GND.4@98.799,114.942 ; 98.169,114.681 cw(c98.169,113.79) GND.4@98.799,114.42 ; 98.169,114.681 ccw(c98.169,115.572) GND.4@98.799,114.942 ; 98.169,114.681 cw(c98.169,113.79) GND.4@98.799,114.42 ; C4.2@98.746,54.55 cw(c97.987,53.791) 99.06,53.791 ; C4.2@98.746,54.55 cw(c97.987,53.791) 99.06,53.791 ; C4.2@98.746,54.55 cw(c97.987,53.791) 99.06,53.791 ; C4.2@98.746,54.55 cw(c97.987,53.791) 99.06,53.791 ; C4.2@98.746,54.55 cw(c97.987,53.791) 99.06,53.791 ; C4.2@98.746,54.55 cw(c97.987,53.791) 99.06,53.791 ; C4.2@98.746,54.55 cw(c97.987,53.791) 99.06,53.791 ; C4.2@98.746,54.55 cw(c97.987,53.791) 99.06,53.791 ; C4.2@98.746,54.55 cw(c97.987,53.791) 99.06,53.791 ; C4.2@98.746,54.55 cw(c97.987,53.791) 99.06,53.791 ; 99.06,53.791 cw(c100.133,53.791) C4.2@99.374,54.55 ; 99.06,53.791 cw(c100.133,53.791) C4.2@99.374,54.55 ; 99.06,53.791 cw(c100.133,53.791) C4.2@99.374,54.55 ; 99.06,53.791 cw(c100.133,53.791) C4.2@99.374,54.55 ; 99.06,53.791 cw(c100.133,53.791) C4.2@99.374,54.55 ; 99.06,53.791 cw(c100.133,53.791) C4.2@99.374,54.55 ; 99.06,53.791 cw(c100.133,53.791) C4.2@99.374,54.55 ; 99.06,53.791 cw(c100.133,53.791) C4.2@99.374,54.55 ; 99.06,53.791 cw(c100.133,53.791) C4.2@99.374,54.55 ; 99.06,53.791 cw(c100.133,53.791) C4.2@99.374,54.55 ; GND.4@99.321,114.42 cw(c99.951,113.79) 99.951,114.681 ; GND.4@99.321,114.42 cw(c99.951,113.79) 99.951,114.681 ; GND.4@99.321,114.42 cw(c99.951,113.79) 99.951,114.681 ; GND.4@99.321,114.42 cw(c99.951,113.79) 99.951,114.681 ; GND.4@99.321,114.42 cw(c99.951,113.79) 99.951,114.681 ; GND.4@99.321,114.42 cw(c99.951,113.79) 99.951,114.681 ; GND.4@99.321,114.42 cw(c99.951,113.79) 99.951,114.681 ; GND.4@99.321,114.42 cw(c99.951,113.79) 99.951,114.681 ; GND.4@99.321,114.42 cw(c99.951,113.79) 99.951,114.681 ; GND.4@99.321,114.42 cw(c99.951,113.79) 99.951,114.681 ; GND.4@99.321,114.942 ccw(c99.951,115.572) 99.951,114.681 ; GND.4@99.321,114.942 ccw(c99.951,115.572) 99.951,114.681 ; GND.4@99.321,114.942 ccw(c99.951,115.572) 99.951,114.681 ; GND.4@99.321,114.942 ccw(c99.951,115.572) 99.951,114.681 ; GND.4@99.321,114.942 ccw(c99.951,115.572) 99.951,114.681 ; GND.4@99.321,114.942 ccw(c99.951,115.572) 99.951,114.681 ; GND.4@99.321,114.942 ccw(c99.951,115.572) 99.951,114.681 ; GND.4@99.321,114.942 ccw(c99.951,115.572) 99.951,114.681 ; GND.4@99.321,114.942 ccw(c99.951,115.572) 99.951,114.681 ; GND.4@99.321,114.942 ccw(c99.951,115.572) 99.951,114.681 ; C4.2@99.374,54.55 cw(c100.133,53.791) 100.133,54.864 ; C4.2@99.374,54.55 cw(c100.133,53.791) 100.133,54.864 ; C4.2@99.374,54.55 cw(c100.133,53.791) 100.133,54.864 ; C4.2@99.374,54.55 cw(c100.133,53.791) 100.133,54.864 ; C4.2@99.374,54.55 cw(c100.133,53.791) 100.133,54.864 ; C4.2@99.374,54.55 cw(c100.133,53.791) 100.133,54.864 ; C4.2@99.374,54.55 cw(c100.133,53.791) 100.133,54.864 ; C4.2@99.374,54.55 cw(c100.133,53.791) 100.133,54.864 ; C4.2@99.374,54.55 cw(c100.133,53.791) 100.133,54.864 ; C4.2@99.374,54.55 cw(c100.133,53.791) 100.133,54.864 ; C4.2@99.374,55.178 ccw(c100.133,55.937) 100.133,54.864 ; C4.2@99.374,55.178 ccw(c100.133,55.937) 100.133,54.864 ; C4.2@99.374,55.178 ccw(c100.133,55.937) 100.133,54.864 ; C4.2@99.374,55.178 ccw(c100.133,55.937) 100.133,54.864 ; C4.2@99.374,55.178 ccw(c100.133,55.937) 100.133,54.864 ; C4.2@99.374,55.178 ccw(c100.133,55.937) 100.133,54.864 ; C4.2@99.374,55.178 ccw(c100.133,55.937) 100.133,54.864 ; C4.2@99.374,55.178 ccw(c100.133,55.937) 100.133,54.864 ; C4.2@99.374,55.178 ccw(c100.133,55.937) 100.133,54.864 ; C4.2@99.374,55.178 ccw(c100.133,55.937) 100.133,54.864 ; C3.2@99.374,64.583 cw(c100.133,63.824) 100.133,64.897 ; C3.2@99.374,64.583 cw(c100.133,63.824) 100.133,64.897 ; C3.2@99.374,64.583 cw(c100.133,63.824) 100.133,64.897 ; C3.2@99.374,64.583 cw(c100.133,63.824) 100.133,64.897 ; C3.2@99.374,64.583 cw(c100.133,63.824) 100.133,64.897 ; C3.2@99.374,64.583 cw(c100.133,63.824) 100.133,64.897 ; C3.2@99.374,64.583 cw(c100.133,63.824) 100.133,64.897 ; C3.2@99.374,64.583 cw(c100.133,63.824) 100.133,64.897 ; C3.2@99.374,64.583 cw(c100.133,63.824) 100.133,64.897 ; C3.2@99.374,64.583 cw(c100.133,63.824) 100.133,64.897 ; C3.2@99.374,65.211 ccw(c100.133,65.97) 100.133,64.897 ; C3.2@99.374,65.211 ccw(c100.133,65.97) 100.133,64.897 ; C3.2@99.374,65.211 ccw(c100.133,65.97) 100.133,64.897 ; C3.2@99.374,65.211 ccw(c100.133,65.97) 100.133,64.897 ; C3.2@99.374,65.211 ccw(c100.133,65.97) 100.133,64.897 ; C3.2@99.374,65.211 ccw(c100.133,65.97) 100.133,64.897 ; C3.2@99.374,65.211 ccw(c100.133,65.97) 100.133,64.897 ; C3.2@99.374,65.211 ccw(c100.133,65.97) 100.133,64.897 ; C3.2@99.374,65.211 ccw(c100.133,65.97) 100.133,64.897 ; C3.2@99.374,65.211 ccw(c100.133,65.97) 100.133,64.897 ; GND.4@99.501,114.24 cw(c100.564,113.177) 100.564,114.681 ; GND.4@99.501,114.24 cw(c100.564,113.177) 100.564,114.681 ; GND.4@99.501,114.24 cw(c100.564,113.177) 100.564,114.681 ; GND.4@99.501,114.24 cw(c100.564,113.177) 100.564,114.681 ; GND.4@99.501,114.24 cw(c100.564,113.177) 100.564,114.681 ; GND.4@99.501,114.24 cw(c100.564,113.177) 100.564,114.681 ; GND.4@99.501,114.24 cw(c100.564,113.177) 100.564,114.681 ; GND.4@99.501,114.24 cw(c100.564,113.177) 100.564,114.681 ; GND.4@99.501,114.24 cw(c100.564,113.177) 100.564,114.681 ; GND.4@99.501,114.24 cw(c100.564,113.177) 100.564,114.681 ; GND.4@99.501,115.122 ccw(c100.564,116.185) 100.564,114.681 ; GND.4@99.501,115.122 ccw(c100.564,116.185) 100.564,114.681 ; GND.4@99.501,115.122 ccw(c100.564,116.185) 100.564,114.681 ; GND.4@99.501,115.122 ccw(c100.564,116.185) 100.564,114.681 ; GND.4@99.501,115.122 ccw(c100.564,116.185) 100.564,114.681 ; GND.4@99.501,115.122 ccw(c100.564,116.185) 100.564,114.681 ; GND.4@99.501,115.122 ccw(c100.564,116.185) 100.564,114.681 ; GND.4@99.501,115.122 ccw(c100.564,116.185) 100.564,114.681 ; GND.4@99.501,115.122 ccw(c100.564,116.185) 100.564,114.681 ; GND.4@99.501,115.122 ccw(c100.564,116.185) 100.564,114.681 ; 100.096,114.681 cw(c100.096,113.177) GND.3@101.159,114.24 ; 100.096,114.681 ccw(c100.096,116.185) GND.3@101.159,115.122 ; 100.096,114.681 cw(c100.096,113.177) GND.3@101.159,114.24 ; 100.096,114.681 ccw(c100.096,116.185) GND.3@101.159,115.122 ; 100.096,114.681 cw(c100.096,113.177) GND.3@101.159,114.24 ; 100.096,114.681 ccw(c100.096,116.185) GND.3@101.159,115.122 ; 100.096,114.681 ccw(c100.096,116.185) GND.3@101.159,115.122 ; 100.096,114.681 cw(c100.096,113.177) GND.3@101.159,114.24 ; 100.096,114.681 ccw(c100.096,116.185) GND.3@101.159,115.122 ; 100.096,114.681 cw(c100.096,113.177) GND.3@101.159,114.24 ; 100.096,114.681 ccw(c100.096,116.185) GND.3@101.159,115.122 ; 100.096,114.681 cw(c100.096,113.177) GND.3@101.159,114.24 ; 100.096,114.681 ccw(c100.096,116.185) GND.3@101.159,115.122 ; 100.096,114.681 cw(c100.096,113.177) GND.3@101.159,114.24 ; 100.096,114.681 ccw(c100.096,116.185) GND.3@101.159,115.122 ; 100.096,114.681 cw(c100.096,113.177) GND.3@101.159,114.24 ; 100.096,114.681 ccw(c100.096,116.185) GND.3@101.159,115.122 ; 100.096,114.681 cw(c100.096,113.177) GND.3@101.159,114.24 ; 100.096,114.681 ccw(c100.096,116.185) GND.3@101.159,115.122 ; 100.096,114.681 cw(c100.096,113.177) GND.3@101.159,114.24 ; 100.709,114.681 cw(c100.709,113.79) GND.3@101.339,114.42 ; 100.709,114.681 ccw(c100.709,115.572) GND.3@101.339,114.942 ; 100.709,114.681 cw(c100.709,113.79) GND.3@101.339,114.42 ; 100.709,114.681 ccw(c100.709,115.572) GND.3@101.339,114.942 ; 100.709,114.681 cw(c100.709,113.79) GND.3@101.339,114.42 ; 100.709,114.681 ccw(c100.709,115.572) GND.3@101.339,114.942 ; 100.709,114.681 ccw(c100.709,115.572) GND.3@101.339,114.942 ; 100.709,114.681 cw(c100.709,113.79) GND.3@101.339,114.42 ; 100.709,114.681 ccw(c100.709,115.572) GND.3@101.339,114.942 ; 100.709,114.681 cw(c100.709,113.79) GND.3@101.339,114.42 ; 100.709,114.681 ccw(c100.709,115.572) GND.3@101.339,114.942 ; 100.709,114.681 cw(c100.709,113.79) GND.3@101.339,114.42 ; 100.709,114.681 ccw(c100.709,115.572) GND.3@101.339,114.942 ; 100.709,114.681 cw(c100.709,113.79) GND.3@101.339,114.42 ; 100.709,114.681 ccw(c100.709,115.572) GND.3@101.339,114.942 ; 100.709,114.681 cw(c100.709,113.79) GND.3@101.339,114.42 ; 100.709,114.681 ccw(c100.709,115.572) GND.3@101.339,114.942 ; 100.709,114.681 cw(c100.709,113.79) GND.3@101.339,114.42 ; 100.709,114.681 ccw(c100.709,115.572) GND.3@101.339,114.942 ; 100.709,114.681 cw(c100.709,113.79) GND.3@101.339,114.42 ; GND.3@101.861,114.42 cw(c102.491,113.79) 102.491,114.681 ; GND.3@101.861,114.42 cw(c102.491,113.79) 102.491,114.681 ; GND.3@101.861,114.42 cw(c102.491,113.79) 102.491,114.681 ; GND.3@101.861,114.42 cw(c102.491,113.79) 102.491,114.681 ; GND.3@101.861,114.42 cw(c102.491,113.79) 102.491,114.681 ; GND.3@101.861,114.42 cw(c102.491,113.79) 102.491,114.681 ; GND.3@101.861,114.42 cw(c102.491,113.79) 102.491,114.681 ; GND.3@101.861,114.42 cw(c102.491,113.79) 102.491,114.681 ; GND.3@101.861,114.42 cw(c102.491,113.79) 102.491,114.681 ; GND.3@101.861,114.42 cw(c102.491,113.79) 102.491,114.681 ; GND.3@101.861,114.942 ccw(c102.491,115.572) 102.491,114.681 ; GND.3@101.861,114.942 ccw(c102.491,115.572) 102.491,114.681 ; GND.3@101.861,114.942 ccw(c102.491,115.572) 102.491,114.681 ; GND.3@101.861,114.942 ccw(c102.491,115.572) 102.491,114.681 ; GND.3@101.861,114.942 ccw(c102.491,115.572) 102.491,114.681 ; GND.3@101.861,114.942 ccw(c102.491,115.572) 102.491,114.681 ; GND.3@101.861,114.942 ccw(c102.491,115.572) 102.491,114.681 ; GND.3@101.861,114.942 ccw(c102.491,115.572) 102.491,114.681 ; GND.3@101.861,114.942 ccw(c102.491,115.572) 102.491,114.681 ; GND.3@101.861,114.942 ccw(c102.491,115.572) 102.491,114.681 ; GND.3@102.041,114.24 cw(c103.104,113.177) 103.104,114.681 ; GND.3@102.041,114.24 cw(c103.104,113.177) 103.104,114.681 ; GND.3@102.041,114.24 cw(c103.104,113.177) 103.104,114.681 ; GND.3@102.041,114.24 cw(c103.104,113.177) 103.104,114.681 ; GND.3@102.041,114.24 cw(c103.104,113.177) 103.104,114.681 ; GND.3@102.041,114.24 cw(c103.104,113.177) 103.104,114.681 ; GND.3@102.041,114.24 cw(c103.104,113.177) 103.104,114.681 ; GND.3@102.041,114.24 cw(c103.104,113.177) 103.104,114.681 ; GND.3@102.041,114.24 cw(c103.104,113.177) 103.104,114.681 ; GND.3@102.041,114.24 cw(c103.104,113.177) 103.104,114.681 ; GND.3@102.041,115.122 ccw(c103.104,116.185) 103.104,114.681 ; GND.3@102.041,115.122 ccw(c103.104,116.185) 103.104,114.681 ; GND.3@102.041,115.122 ccw(c103.104,116.185) 103.104,114.681 ; GND.3@102.041,115.122 ccw(c103.104,116.185) 103.104,114.681 ; GND.3@102.041,115.122 ccw(c103.104,116.185) 103.104,114.681 ; GND.3@102.041,115.122 ccw(c103.104,116.185) 103.104,114.681 ; GND.3@102.041,115.122 ccw(c103.104,116.185) 103.104,114.681 ; GND.3@102.041,115.122 ccw(c103.104,116.185) 103.104,114.681 ; GND.3@102.041,115.122 ccw(c103.104,116.185) 103.104,114.681 ; GND.3@102.041,115.122 ccw(c103.104,116.185) 103.104,114.681 ; 102.636,114.681 cw(c102.636,113.177) GND.2@103.699,114.24 ; 102.636,114.681 ccw(c102.636,116.185) GND.2@103.699,115.122 ; 102.636,114.681 cw(c102.636,113.177) GND.2@103.699,114.24 ; 102.636,114.681 ccw(c102.636,116.185) GND.2@103.699,115.122 ; 102.636,114.681 cw(c102.636,113.177) GND.2@103.699,114.24 ; 102.636,114.681 ccw(c102.636,116.185) GND.2@103.699,115.122 ; 102.636,114.681 ccw(c102.636,116.185) GND.2@103.699,115.122 ; 102.636,114.681 cw(c102.636,113.177) GND.2@103.699,114.24 ; 102.636,114.681 ccw(c102.636,116.185) GND.2@103.699,115.122 ; 102.636,114.681 cw(c102.636,113.177) GND.2@103.699,114.24 ; 102.636,114.681 ccw(c102.636,116.185) GND.2@103.699,115.122 ; 102.636,114.681 cw(c102.636,113.177) GND.2@103.699,114.24 ; 102.636,114.681 ccw(c102.636,116.185) GND.2@103.699,115.122 ; 102.636,114.681 cw(c102.636,113.177) GND.2@103.699,114.24 ; 102.636,114.681 ccw(c102.636,116.185) GND.2@103.699,115.122 ; 102.636,114.681 cw(c102.636,113.177) GND.2@103.699,114.24 ; 102.636,114.681 ccw(c102.636,116.185) GND.2@103.699,115.122 ; 102.636,114.681 cw(c102.636,113.177) GND.2@103.699,114.24 ; 102.636,114.681 ccw(c102.636,116.185) GND.2@103.699,115.122 ; 102.636,114.681 cw(c102.636,113.177) GND.2@103.699,114.24 ; JP5.6@102.877,108.832 cw(c103.507,108.202) 103.507,109.093 ; JP5.6@102.877,108.832 cw(c103.507,108.202) 103.507,109.093 ; JP5.6@102.877,108.832 cw(c103.507,108.202) 103.507,109.093 ; JP5.6@102.877,108.832 cw(c103.507,108.202) 103.507,109.093 ; JP5.6@102.877,108.832 cw(c103.507,108.202) 103.507,109.093 ; JP5.6@102.877,108.832 cw(c103.507,108.202) 103.507,109.093 ; JP5.6@102.877,108.832 cw(c103.507,108.202) 103.507,109.093 ; JP5.6@102.877,108.832 cw(c103.507,108.202) 103.507,109.093 ; JP5.6@102.877,108.832 cw(c103.507,108.202) 103.507,109.093 ; JP5.6@102.877,108.832 cw(c103.507,108.202) 103.507,109.093 ; JP5.6@102.877,109.354 ccw(c103.507,109.984) 103.507,109.093 ; JP5.6@102.877,109.354 ccw(c103.507,109.984) 103.507,109.093 ; JP5.6@102.877,109.354 ccw(c103.507,109.984) 103.507,109.093 ; JP5.6@102.877,109.354 ccw(c103.507,109.984) 103.507,109.093 ; JP5.6@102.877,109.354 ccw(c103.507,109.984) 103.507,109.093 ; JP5.6@102.877,109.354 ccw(c103.507,109.984) 103.507,109.093 ; JP5.6@102.877,109.354 ccw(c103.507,109.984) 103.507,109.093 ; JP5.6@102.877,109.354 ccw(c103.507,109.984) 103.507,109.093 ; JP5.6@102.877,109.354 ccw(c103.507,109.984) 103.507,109.093 ; JP5.6@102.877,109.354 ccw(c103.507,109.984) 103.507,109.093 ; JP5.6@103.057,108.652 cw(c104.12,107.589) 104.12,109.093 ; JP5.6@103.057,108.652 cw(c104.12,107.589) 104.12,109.093 ; JP5.6@103.057,108.652 cw(c104.12,107.589) 104.12,109.093 ; JP5.6@103.057,108.652 cw(c104.12,107.589) 104.12,109.093 ; JP5.6@103.057,108.652 cw(c104.12,107.589) 104.12,109.093 ; JP5.6@103.057,108.652 cw(c104.12,107.589) 104.12,109.093 ; JP5.6@103.057,108.652 cw(c104.12,107.589) 104.12,109.093 ; JP5.6@103.057,108.652 cw(c104.12,107.589) 104.12,109.093 ; JP5.6@103.057,108.652 cw(c104.12,107.589) 104.12,109.093 ; JP5.6@103.057,108.652 cw(c104.12,107.589) 104.12,109.093 ; JP5.6@103.057,109.534 ccw(c104.12,110.597) 104.12,109.093 ; JP5.6@103.057,109.534 ccw(c104.12,110.597) 104.12,109.093 ; JP5.6@103.057,109.534 ccw(c104.12,110.597) 104.12,109.093 ; JP5.6@103.057,109.534 ccw(c104.12,110.597) 104.12,109.093 ; JP5.6@103.057,109.534 ccw(c104.12,110.597) 104.12,109.093 ; JP5.6@103.057,109.534 ccw(c104.12,110.597) 104.12,109.093 ; JP5.6@103.057,109.534 ccw(c104.12,110.597) 104.12,109.093 ; JP5.6@103.057,109.534 ccw(c104.12,110.597) 104.12,109.093 ; JP5.6@103.057,109.534 ccw(c104.12,110.597) 104.12,109.093 ; JP5.6@103.057,109.534 ccw(c104.12,110.597) 104.12,109.093 ; 103.249,114.681 cw(c103.249,113.79) GND.2@103.879,114.42 ; 103.249,114.681 ccw(c103.249,115.572) GND.2@103.879,114.942 ; 103.249,114.681 cw(c103.249,113.79) GND.2@103.879,114.42 ; 103.249,114.681 ccw(c103.249,115.572) GND.2@103.879,114.942 ; 103.249,114.681 cw(c103.249,113.79) GND.2@103.879,114.42 ; 103.249,114.681 ccw(c103.249,115.572) GND.2@103.879,114.942 ; 103.249,114.681 ccw(c103.249,115.572) GND.2@103.879,114.942 ; 103.249,114.681 cw(c103.249,113.79) GND.2@103.879,114.42 ; 103.249,114.681 ccw(c103.249,115.572) GND.2@103.879,114.942 ; 103.249,114.681 cw(c103.249,113.79) GND.2@103.879,114.42 ; 103.249,114.681 ccw(c103.249,115.572) GND.2@103.879,114.942 ; 103.249,114.681 cw(c103.249,113.79) GND.2@103.879,114.42 ; 103.249,114.681 ccw(c103.249,115.572) GND.2@103.879,114.942 ; 103.249,114.681 cw(c103.249,113.79) GND.2@103.879,114.42 ; 103.249,114.681 ccw(c103.249,115.572) GND.2@103.879,114.942 ; 103.249,114.681 cw(c103.249,113.79) GND.2@103.879,114.42 ; 103.249,114.681 ccw(c103.249,115.572) GND.2@103.879,114.942 ; 103.249,114.681 cw(c103.249,113.79) GND.2@103.879,114.42 ; 103.249,114.681 ccw(c103.249,115.572) GND.2@103.879,114.942 ; 103.249,114.681 cw(c103.249,113.79) GND.2@103.879,114.42 ; 103.652,109.093 cw(c103.652,107.589) JP5.8@104.715,108.652